# Altium PCB 100064667.PcbDoc (part 2 of 2)
Units mil, origin at the board's own origin, x right, y up, seen from the top; angles counter-clockwise.
Board outline 1193.35 x 1920 mil, 8 copper layers (F.Cu, In1.Cu, In2.Cu, In3.Cu, ln4.Cu, In5.Cu, In6.Cu, B.Cu), stack 57.778 mil thick; 91 components, 64 nets, 294 pads, 112 vias.
Unrouted connection lines stored in the file: 2.
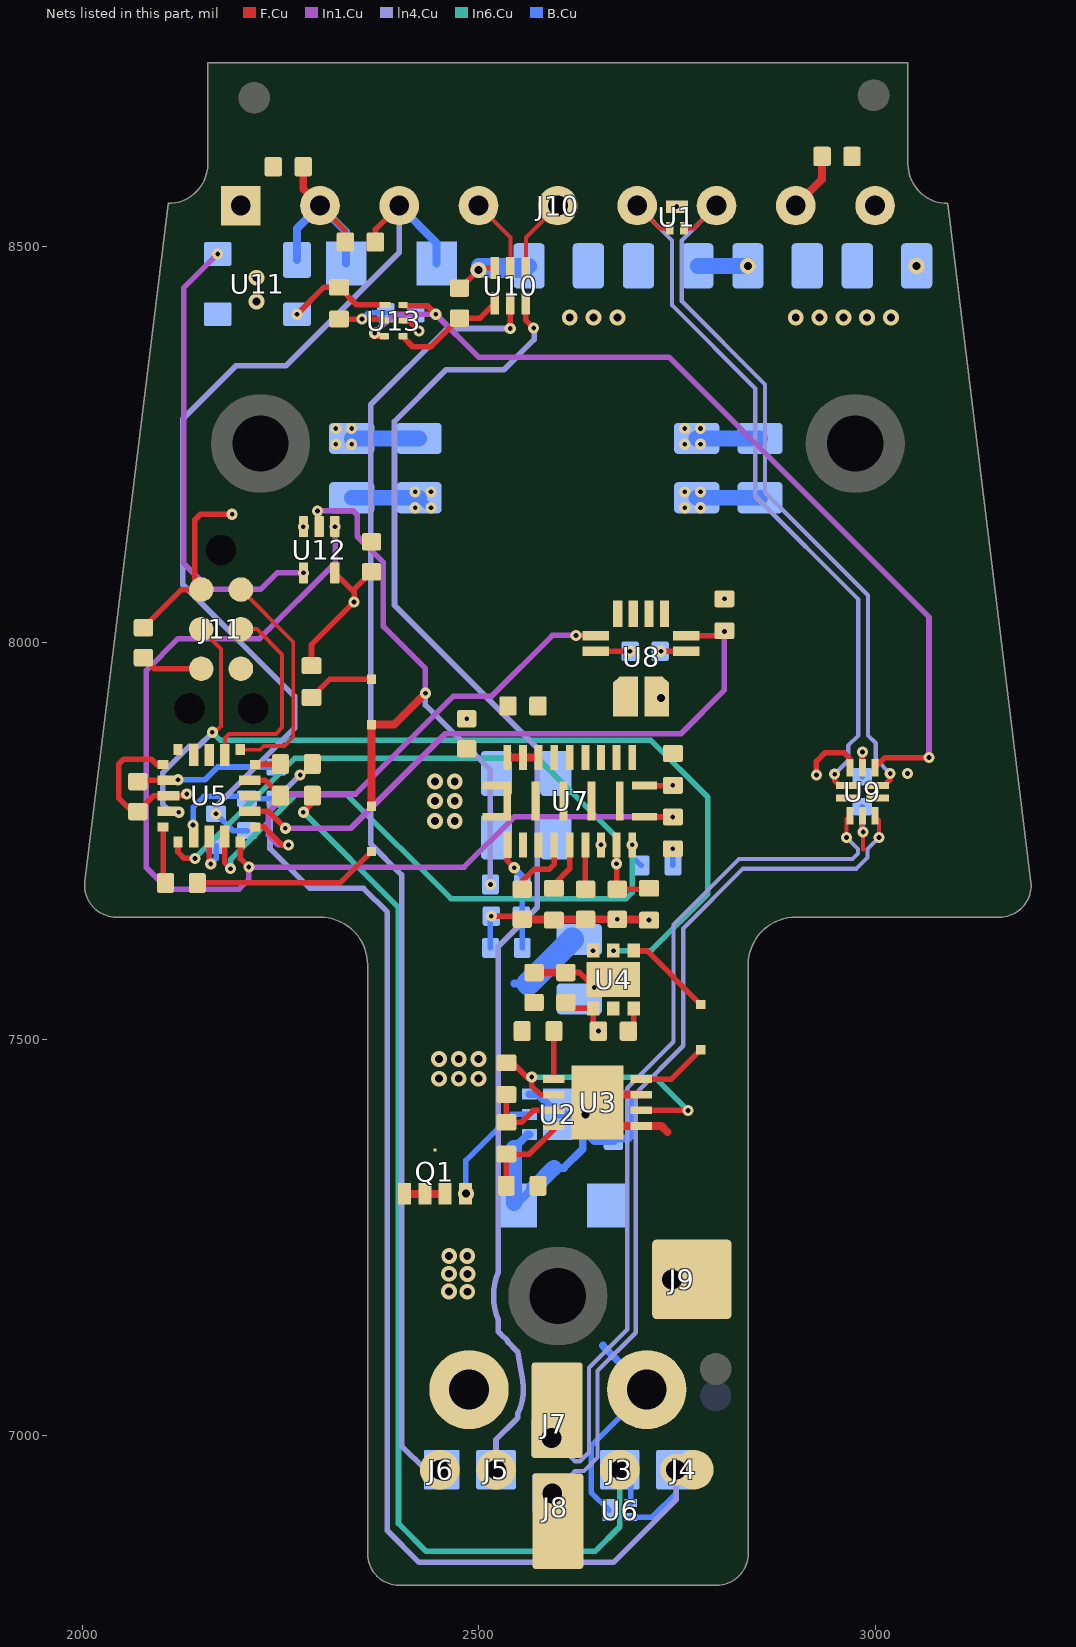
[diagram p8: the nets of this part, all layers, seen from the top]

## Part data
C1 C2 C6 C7 C13 C18 C23 C27 C28 C29 C30 C31 C32 C33: library part CAP-00363-2, "Cap 0402 100nF 10% X7R", Manufacturer="Murata Electronics", MPN=GCM155R71H104ME02D, Footprint=Capacitor_SMD:C_0402_1005Metric, Datasheet=https://search.murata.co.jp/Ceramy/image/img/A01X/G101/ENG/GCM155R71H104ME02-01.pdf, Description="CAP CER 0.1UF 50V X7R 0402", ki_fp_filters=C_*
C3 C11 C12: library part CAP-00370-1, "CAP 0805 10UF 50V 10% X5R", MPN=GRM21BR61H106KE43L, Manufacturer="Murata Electronics", Footprint=Capacitor_SMD:C_0805_2012Metric, Datasheet=https://search.murata.co.jp/Ceramy/image/img/A01X/G101/ENG/GRM21BR61H106KE43-01A.pdf, Description="CAP CER 10UF 50V X5R 0805", ki_fp_filters=C_*
C4 C14: library part CAP-00186-4, "0402 10 nF 50 V ±10 % Tolerance X7R SMT Multilayer Ceramic Capacitor", Manufacturer="Murata Electronics", MPN=GCM155R71H103KA55D, Footprint=Capacitor_SMD:C_0402_1005Metric, Datasheet=https://search.murata.co.jp/Ceramy/image/img/A01X/G101/ENG/GCM155R71H103KA55-01.pdf, Description="CAP CER 10000PF 50V X7R 0402"
C5 C9: library part CAP-00021-6, "Cap 0402 10uF 10V 20% X5R", Manufacturer="Murata Electronics", MPN=GRM155R60J106ME05D, Footprint=Capacitor_SMD:C_0402_1005Metric, Datasheet=https://search.murata.co.jp/Ceramy/image/img/A01X/G101/ENG/GRM155R60J106ME05-01A.pdf, Description="CAP CER 10UF 6.3V X5R 0402", ki_fp_filters=C_*
C8: library part CAP-00371-1, "CAP 0402 4700PF 50V 10% X7R", MPN=GCM155R71H472KA37J, Manufacturer="Murata Electronics", Footprint=Capacitor_SMD:C_0402_1005Metric, Datasheet=https://search.murata.co.jp/Ceramy/image/img/A01X/G101/ENG/GCM155R71H472KA37-01.pdf, Description="CAP CER 4700PF 50V X7R 0402"
C10: library part CAP-00366-2, "Cap 0402 0.33uF 16V 10% X7S", Manufacturer="Murata Electronics", MPN=GRT155R61A334KE01J, Footprint=Capacitor_SMD:C_0402_1005Metric, Datasheet=https://search.murata.co.jp/Ceramy/image/img/A01X/G101/ENG/GRT155R61A334KE01-01.pdf, Description="CAP CER 0.33UF 10V X5R 0402", ki_fp_filters=C_*
C15 C16 C17 C19 C20 C21 C22: library part CAP-00375-1, "CAP 0805 22uF 35V 20% X5R", Manufacturer="TDK Corporation", MPN=C2012X5R1V226M125AC, Footprint=Capacitor_SMD:C_0805_2012Metric, Datasheet=https://product.tdk.com/system/files/dam/doc/product/capacitor/ceramic/mlcc/catalog/mlcc_commercial_general_en.pdf, Description="CAP CER 22UF 35V X5R 0805", ki_fp_filters=C_*
C24: library part CAP-00372-1, "CAP 0805 4.7UF 50V 10% X7R", Manufacturer="Murata Electronics", MPN=GRM21BZ71H475KE15L, Footprint=Capacitor_SMD:C_0805_2012Metric, Datasheet=https://search.murata.co.jp/Ceramy/image/img/A01X/G101/ENG/GRM21BZ71H475KE15-01.pdf, Description="CAP CER 4.7UF 50V X7R 0805", ki_fp_filters=C_*
D1: library part CMP-00657-1, "SMF Series 200 W 26 V Uni-Directional Surface Mount TVS Diode - SOD-123F", Mfr=Littelfuse, MPN=SMF26CA, Footprint=1a_Littelfuse:SOD-123FL, Datasheet=https://www.littelfuse.com/~/media/electronics/datasheets/tvs_diodes/littelfuse_tvs_diode_smf_datasheet.pdf.pdf, Description="TVS SOD123FL 26V 200W BIDIR", Manufacturer=Littelfuse
D4: library part CMP-00658-1, "ESD protection diodes / TVS diodes; LITTELFUSE; SMF3.3; 6.8 V; 30 A; 3.3 V; 3.4 V - 4.3 V", Mfr=Littelfuse, MPN=SMF3.3, Footprint=1a_Littelfuse:SOD-123FL, Datasheet=https://www.littelfuse.com/~/media/electronics/datasheets/tvs_diodes/littelfuse_tvs_diode_smf3_3_datasheet.pdf.pdf, Description="TVS DIODE 3.3VWM 6.8VC SOD123FL", Manufacturer=Littelfuse
FID1 FID2 FID3 FID4 FID5 FID6: library part Fiducial_40mil_mask_60mil, Footprint=1a_TestBoard_Library:Fiducial_Cu0.040_Mask0.060, ki_fp_filters=Fiducial*
J1 J2: library part PTH_18AWG, Footprint=1a_Misc:PTH_18AWG
J3 J4 J5 J6 J7 J8 J9: library part PTH_24AWG_offset_rectangle
  J3: Footprint=1a_Misc:PTH_24AWG_offset_L_flipped_complement
  J4: Footprint=1a_Misc:PTH_24AWG_offset_L_flipped
  J5: Footprint=1a_Misc:PTH_24AWG_offset_L_complement
  J6: Footprint=1a_Misc:PTH_24AWG_offset_L
  J7: Footprint=1a_Misc:PTH_24AWG_offset_120x64_flipped
  J8: Footprint=1a_Misc:PTH_24AWG_offset_120x64
  J9: Footprint=1a_Misc:PTH_24AWG_100_mil_square
J10: library part 399-10-109-10-007000, Manufacturer="Mill-Max Manufacturing Corp.", Footprint=1a_Misc:399-10-109-10-007000, Datasheet=https://www.mouser.com/datasheet/2/273/MMMC_S_A0002059875_1-2553789.pdf, Description="Pogo pin target, 9 socket, 0.1\" pitch, right angle", MPN=399-10-109-10-007000
J11: library part Conn_ARM_SWD_TagConnect_TC2030-NL, Manufacturer="Tag-Connect LLC", MPN=TC2030-CTX, Footprint=Connector:Tag-Connect_TC2030-IDC-NL_2x03_P1.27mm_Vertical, Datasheet=https://www.tag-connect.com/wp-content/uploads/bsk-pdf-manager/TC2030-CTX_1.pdf, Description="Tag-Connect ARM Cortex SWD JTAG connector, 6 pin, no legs", ki_fp_filters=*TC2030*
JP1 JP2: library part Jumper_2_Bridged, Footprint=Jumper:SolderJumper-2_P1.3mm_Open_TrianglePad1.0x1.5mm, ki_fp_filters="Jumper* TestPoint*2Pads* TestPoint*Bridge*"
JP3: library part Jumper_2_Open, Footprint=Jumper:SolderJumper-2_P1.3mm_Open_TrianglePad1.0x1.5mm, ki_fp_filters="Jumper* TestPoint*2Pads* TestPoint*Bridge*"
MH1 MH2 MH3: library part 96773A622_0.125in_keepout, Footprint=1a_Misc:96773A622_M1.6_screw_hole_0.125in_keepout, Datasheet=https://www.mcmaster.com/mvD/Library/M1/20210910/B2E27164/96773A622_JIS%20Steel%20Pan%20Head%20Screws.PDF, Description="Mounting hole for 96773A622 M1.6 screw 0.125\" keepout"
Q1: library part CMP-00665-1, "Transistor MOSFET N-Channel 40V 150A 8-Pin PQFN T/R", Manufacturer=onsemi, MPN=NTTFS2D1N04HLTWG, Footprint=1a_Misc:WDFN8_3.3_x_3.3_0.65mm_p, Datasheet=https://www.onsemi.com/pdf/datasheet/nttfs2d1n04hl-d.pdf, Description="MOSFET N-CH 40V 24A/150A 8PQFN"
R1: library part RES-00797-1, "RES 0402 787K 1% 1/10W", MPN=ERJ-2RKF7873X, Manufacturer="Panasonic Electronic Components", Footprint=Resistor_SMD:R_0402_1005Metric, Datasheet=https://industrial.panasonic.com/cdbs/www-data/pdf/RDA0000/AOA0000C304.pdf, Description="RES SMD 787K OHM 1% 1/10W 0402", ki_fp_filters=R_*
R2: library part RES-00798-1, "RES 0402 12.4K 1% 1/16W", MPN=ERA-2ARB1242X, Manufacturer="Panasonic Electronic Components", Footprint=Resistor_SMD:R_0402_1005Metric, Datasheet=https://industrial.panasonic.com/cdbs/www-data/pdf/RDM0000/AOA0000C307.pdf, Description="RES SMD 12.4KOHM 0.1% 1/16W 0402", ki_fp_filters=R_*
R3: library part RES-00272-5, "Res Thick Film 0402 200K Ohm 1% 1/16W ±100ppm/°C Molded SMD SMD Paper Tape on Plastic Reel", Manufacturer="Stackpole Electronics Inc", MPN=RNCF0402BKE200K, Footprint=Resistor_SMD:R_0402_1005Metric, Datasheet=https://www.seielect.com/Catalog/SEI-RNCF.pdf, Description="RES 200K OHM 0.1% 1/16W 0402"
R4: library part RES-00800-1, "RES 0402 1K 1/10W 1%", Mfr=Panasonic, Manufacturer="Panasonic Electronic Components", MPN=ERJ-2RKF1001X, Footprint=Resistor_SMD:R_0402_1005Metric, Datasheet=https://industrial.panasonic.com/cdbs/www-data/pdf/RDA0000/AOA0000C304.pdf, Description="RES SMD 1K OHM 1% 1/10W 0402", ki_fp_filters=R_*
R5 R6: library part RES-00801-1, "RES 0402 200 OHM 1/10W 1%", MPN=ERJ-2RKF2000X, Mfr=Panasonic, Manufacturer="Panasonic Electronic Components", Footprint=Resistor_SMD:R_0402_1005Metric, Datasheet=https://industrial.panasonic.com/cdbs/www-data/pdf/RDA0000/AOA0000C304.pdf, Description="RES SMD 200 OHM 1% 1/10W 0402", ki_fp_filters=R_*
R7 R8: library part RES-00296-6, "Res 0402 2K Ohm 1/10W 1% Thick Flim", MPN=ERJ-2RKF2001X, Manufacturer="Panasonic Electronic Components", Footprint=Resistor_SMD:R_0402_1005Metric, Datasheet=https://industrial.panasonic.com/cdbs/www-data/pdf/RDA0000/AOA0000C304.pdf, Description="RES SMD 2K OHM 1% 1/10W 0402", ki_fp_filters=R_*
R9: library part RES-00021-9, "Res 0402 100 Ohm 0.1W 1% Thick Film", MPN=ERJ-2RKF1000X, Mfr=Panasonic, Manufacturer="Panasonic Electronic Components", Footprint=Resistor_SMD:R_0402_1005Metric, Datasheet=https://industrial.panasonic.com/cdbs/www-data/pdf/RDA0000/AOA0000C304.pdf, Description="RES SMD 100 OHM 1% 1/10W 0402", ki_fp_filters=R_*
R10 R11: library part RES-00802-1, "RES 0402 499 OHM 1/10W 1%", Manufacturer="Panasonic Electronic Components", MPN=ERJ-2RKF4990X, Footprint=Resistor_SMD:R_0402_1005Metric, Datasheet=https://industrial.panasonic.com/cdbs/www-data/pdf/RDA0000/AOA0000C304.pdf, Description="RES SMD 499 OHM 1% 1/10W 0402", ki_fp_filters=R_*
R12: library part RES-00405-6, "Res 0402 20k 1/16W 1% Thick Film", MPN=ERJ-2RKF2002X, Manufacturer="Panasonic Electronic Components", Footprint=Resistor_SMD:R_0402_1005Metric, Datasheet=https://industrial.panasonic.com/cdbs/www-data/pdf/RDA0000/AOA0000C304.pdf, Description="RES SMD 20K OHM 1% 1/10W 0402", ki_fp_filters=R_*
R13: library part RES-00025-9, "Res 0402 1.00M 0.1W 1% Thick Film", MPN=ERJ-2RKF1004X, Manufacturer="Panasonic Electronic Components", Footprint=Resistor_SMD:R_0402_1005Metric, Datasheet=https://industrial.panasonic.com/cdbs/www-data/pdf/RDA0000/AOA0000C304.pdf, Description="RES SMD 1M OHM 1% 1/10W 0402", ki_fp_filters=R_*
R14 R15 R20: library part RES-00803-1, "RES 0402 10K 1/10W 1%", MPN=ERJ-U02F1002X, Manufacturer="Panasonic Electronic Components", Footprint=Resistor_SMD:R_0402_1005Metric, Datasheet=https://industrial.panasonic.com/cdbs/www-data/pdf/RDP0000/AOA0000C334.pdf, Description="RES 10K OHM 1% 1/10W 0402", ki_fp_filters=R_*
R16: library part RES-00804-1, "RES 0402 22.1K 1/10W 1%", MPN=ERJ-2RKF2212X, Manufacturer="Panasonic Electronic Components", Footprint=Resistor_SMD:R_0402_1005Metric, Datasheet=https://industrial.panasonic.com/cdbs/www-data/pdf/RDA0000/AOA0000C304.pdf, Description="RES SMD 22.1K OHM 1% 1/10W 0402", ki_fp_filters=R_*
R17: library part RES-00805-1, "RES 0402 1.07K 1/10W 1%", MPN=ERJ-2RKF1071X, Manufacturer="Panasonic Electronic Components", Footprint=Resistor_SMD:R_0402_1005Metric, Datasheet=https://industrial.panasonic.com/cdbs/www-data/pdf/RDA0000/AOA0000C304.pdf, Description="RES SMD 1.07K OHM 1% 1/10W 0402", ki_fp_filters=R_*
R18 R19: library part RES-00031-9, "Res 0402 100K 1/10W 1% Thick Flim", MPN=ERJ-2RKF1003X, Manufacturer="Panasonic Electronic Components", Footprint=Resistor_SMD:R_0402_1005Metric, Datasheet=https://industrial.panasonic.com/cdbs/www-data/pdf/RDA0000/AOA0000C304.pdf, Description="RES SMD 100K OHM 1% 1/10W 0402", ki_fp_filters=R_*
R21: library part RES-00031-9, "Res 0402 100K 1/10W 1% Thick Flim", Manufacturer="Panasonic Electronic Components", MPN=ERJ-2RKF1003X, Footprint=Resistor_SMD:R_0402_1005Metric, Datasheet=https://industrial.panasonic.com/cdbs/www-data/pdf/RDA0000/AOA0000C304.pdf, Description="RES SMD 100K OHM 1% 1/10W 0402", ki_fp_filters=R_*
U1 U6: library part CMP-00652-1, "Extremely low capacitance unidirectional ESD protection diode array", MPN=PESD5V0C2UM, Mfr=Nexperia, Footprint=Package_DFN_QFN:Diodes_DFN1006-3, Datasheet=https://assets.nexperia.com/documents/data-sheet/PESD5V0C2UM.pdf, Description="TVS DIODE 5VWM 3.4VC DFN1006-3", Manufacturer=Nexperia
U2: library part IC-00420-1, "OR Controller N-Channel Single 2.4Ohm Automotive 6-Pin WDFNW EP T/R", Manufacturer=onsemi, MPN=NCV68261MTWAITBG, Footprint=1a_Misc:WDFNW6_2x2_0.65p_EP, Datasheet=https://www.onsemi.com/pdf/datasheet/ncv68261-d.pdf, Description="Power Switch/Driver 1:1 N-Channel 6-WDFNW (2x2)"
U3: library part IC-00424-1, "IC SUPERVISOR 1 CHANNEL 8DFN Supervisor Open Drain or Open Collector 1 Channel 8-DFN (3x3)", Manufacturer="Analog Devices Inc.", MPN=LTC2965HDD#PBF, Footprint=Package_DFN_QFN:DFN-8-1EP_3x3mm_P0.5mm_EP1.66x2.38mm, Datasheet=https://www.analog.com/media/en/technical-documentation/data-sheets/2965fc.pdf, Description="IC SUPERVISOR 1 CHANNEL 8DFN"
U4: library part IC-00416-1, "LDO Regulator, 150 mA, 38 V, 1 uA IQ, with PG 3V3 HZ, WDFN6 2x2", Manufacturer=onsemi, MPN=NCP730BMT330TBG, Footprint=1a_Misc:WDFN6_2x2_0.65p_1.72x1.12mm_EP, Datasheet=https://www.onsemi.com/pdf/datasheet/ncp730-d.pdf, Description="IC REG LINEAR 3.3V 150MA 6WDFN"
U5: library part IC-00427-1, "RISC Microcontroller, 32-Bit, FLASH, CORTEX-M4F CPU, 180MHz, CMOS, PBGA216", MPN=STM32C011F6U6TR, Manufacturer=STMicroelectronics, Footprint=Package_DFN_QFN:ST_UFQFPN-20_3x3mm_P0.5mm, Datasheet=https://www.st.com/resource/en/datasheet/stm32c011f4.pdf, Description="STMicroelectronics Arm Cortex-M0+ MCU, 32KB flash, 6KB RAM, 48 MHz, 2.0-3.6V, 18 GPIO, UFQFPN20", ki_fp_filters=ST*UFQFPN*3x3mm*P0.5mm*
U7: library part CMP-00666-1, "7mΩ Protection Switch with Current Monitor for Automotive Battery Systems AEC-Q100 Qualified", Manufacturer="Monolithic Power Systems Inc.", MPN=MPQ5069GQV-AEC1-Z, Footprint=1a_Misc:QFN-22_3_x_5mm, Datasheet=https://www.monolithicpower.com/en/documentview/productdocument/index/version/2/document_type/Datasheet/lang/en/sku/MPQ5069GQV-AEC1/document_id/8141/, Description="Power Switch/Driver 1:1 15A 22-QFN (3x5)"
U8: library part CMP-00662-1, "Linear Current Sensor with Overcurrent Fault Output with <100 V Isolation, QFN-12, RoHS", MPN=ACS711KEXLT-15AB-T, Manufacturer="Allegro MicroSystems", Footprint=Sensor_Current:Allegro_QFN-12-10-1EP_3x3mm_P0.5mm, Datasheet=http://www.allegromicro.com/~/Media/Files/Datasheets/ACS711-Datasheet.ashx, Description="±15A Bidirectional Hall-Effect Current Sensor, +3.3V supply, 90mV/A, QFN-12", ki_fp_filters=Allegro*QFN*EP*3x3mm*P0.5mm*
U9: library part IC-00423-1, "USB Interface, 1: 2 Multiplexer/Demultiplexer Switch, USB 2.0, 2.3 V, 4.3 V, UQFN-B, 10 Pins", MPN=TC7USB40MU, Manufacturer="Toshiba Semiconductor and Storage", Footprint="1a_Misc:Toshiba UQFN-10_1.4x1.8mm_P0.4mm", Datasheet=https://toshiba.semicon-storage.com/info/docget.jsp?did=13632&prodName=TC7USB40MU, Description="IC USB SWITCH SPDT DUAL 10UQFN"
U10: library part IC-00417-1, "Industry's Smallest DPST Can Switch ±5.5V Signals with a Single VCC as Low as 1.6V", MPN=MAX20336AEFT+, Manufacturer="Analog Devices Inc./Maxim Integrated", Footprint=1a_Misc:FC2QFN-6, Datasheet=https://www.analog.com/media/en/technical-documentation/data-sheets/MAX20336.pdf, Description="IC SWITCH DPSTX1 330MOHM 6WLP"
U11: library part IC-00421-1, "4-Pin, µP Voltage Monitors with Pin-Selectable Power-On Reset Timeout Delay", MPN=MAX821UUS+T, Manufacturer="Analog Devices Inc./Maxim Integrated", Footprint="1a_Misc:SOT-143 Maxim", Datasheet=https://www.analog.com/media/en/technical-documentation/data-sheets/max821-max822t.pdf, Description="IC SUPERVISOR 1 CHANNEL 2.78V S78OT143-4"
U12: library part IC-00426-1, "1-ch, 2-input 1.65-V to 5.5-V 32 mA drive strength AND gate 5-SOT-5X3 -40 to 125", MPN=SN74LVC1G08DRLR, Manufacturer="Texas Instruments", Footprint="1a_Misc:SOT-553 Texas Instruments DRL", Datasheet=https://www.ti.com/lit/ds/symlink/sn74lvc1g08.pdf, Description="Single AND Gate, Low-Voltage CMOS", ki_fp_filters="SOT?23* Texas?R-PDSO-G5?DCK* Texas?R-PDSO-N5?DRL* Texas?X2SON*0.8x0.8mm*P0.48mm*"
U13: library part IC-00422-1, "IC INVERTER 2CH 2-INP 6SON Inverter IC 2 Channel 6-SON (1.45x1)", MPN=SN74AUP3G04DQER, Manufacturer="Texas Instruments", Footprint="1a_Misc:QFN-6_1.4x1mm_P0.5mm TI DRY6", Datasheet=https://www.ti.com/lit/ds/symlink/sn74aup3g04.pdf, Description="IC INVERTER 3CH 3-INP 8X2SON", ki_fp_filters=DQE8

## Via types
v1: diameter 14, hole 6, F.Cu to B.Cu, tented both sides, 78 vias
v2: diameter 20, hole 10, F.Cu to B.Cu, tented both sides, 34 vias

## Nets (pads, with @x,y where several pads share a name; then routed paths per layer and width w, separated by ;. In a path a pad name is that pad's centre, name@x,y a point inside that pad or via, vN(x,y) a via of type N, cw(c..) or ccw(c..) an arc to the next point about the centre after c; other vN are vias at no path point)
1WIRE_RX: R9.2 U5.8 | length 61.5
  F.Cu w7: U5.8@2160.32,7755.64 2160.32,7722.82 v1(2162.32,7720.82)
  B.Cu w7: v1(2162.32,7720.82) 2169,7727.5 R9.2@2169,7743.92
1WIRE_TX: R10.2 R11.1 U5.7 | length 148.8
  F.Cu w7: v1(2140,7770) 2140.63,7769.37 U5.7@2140.63,7755.64
  B.Cu w7: v1(2140,7770) 2140,7792.25 2153.75,7806 2205.08,7806 R11.1@2208,7803.08 2244.84,7803.08 R10.2@2245,7802.92
AUX1: J3.1 R6.1 U6.1 | length 1398.4
  F.Cu w5: R6.1@2290.39,7797.39 R6.1@2290.39,7806.82
  F.Cu w7: v1(2279,7786) R6.1@2290.39,7797.39
  In6.Cu w7: v1(2279,7786) 2399,7666 2399,6889 2434,6854 2647,6854 2678,6885 J3.1@2678,6957
  B.Cu w7: J3.1@2678,6957 2691.78,6943.22 U6.1@2691.78,6914.86
AUX2: J4.1 R5.1 U6.2 | length 1641.8
  F.Cu w5: v1(2275,7833) v1@2276.57,7833
  F.Cu w7: v1@2276.57,7833 R5.1@2290.39,7846.82
  ln4.Cu w7: v1(2275,7833) 2237,7795 2237,7740.25 2287.25,7690 2355,7690 2385,7660 2385,6880 2425,6840 2670,6840 2749,6919 J4.1@2749,6957
  B.Cu w7: U6.2@2691.78,6897.14 2691.92,6897 2719,6897 2749,6927 J4.1@2749,6957
DATA_ENABLE: U11.4 U12.4 | length 581.4
  In1.Cu w7: v1(2171,8490) 2128,8447 2128,8100 2161,8067 2225,8067 2245.87,8087.87 v1(2279.32,8087.87)
DETECT: C8.1 D4.1 J10.3 R9.1 R11.2 | length 1215.1
  F.Cu w7: C8.1@2369.9,8505 2369.9,8520.9 J10.3@2400,8551
  ln4.Cu w7: v1(2169,7784.08) 2169,7793 2268,7892 2268,7932 2127,8073 2127,8282 2194,8349 2257,8349 2400,8492 J10.3@2400,8551
  B.Cu w7: v1(2169,7784.08) 2190.16,7762.92 R11.2@2208,7762.92
  B.Cu w10: J10.3@2400,8551 2447.09,8503.91 D4.1@2447.09,8478
GND: C1.2 C2.2 C3.2 C4.2 C5.2 C6.2 C7.1 C8.2 C9.2 C10.2 C11.2 C12.2 C13.2 C14.2 C15.2 C16.2 C17.2 C18.1 C19.2 C20.2 C21.2 C22.2 C23.2 C24.2 C27.1 C28.2 C29.2 C30.2 C31.2 C32.2 C33.2 D1.2 D4.2 J2.1 J9.1 J10.2 J10.8 J11.5 R3.2 R13.2 R14.2 R15.2 R17.2 R21.2 U1.3 U2.3 U2.5 U2.7 U3.5 U3.7 U3.9 U4.3 U4.7 U5.1 U5.3 U6.3 U7.7 U8.3 U9.4 U9.10 U10.3 U11.1 U12.3 U13.2 | length 2240.8
  F.Cu w5: U9.4@2984,7781.74 2984,7762 v1(2985,7761) 2985,7739
  F.Cu w7: C7.1@2077.32,7980.92 2091.42,7966.82 J11.5@2150.32,7966.82 ; U5.1@2102.24,7846.19 2093.94,7846.19 2087.32,7852.82 2052.32,7852.82 2046,7846.5 2046,7804.13 2063.21,7786.92 C6.2@2070.32,7786.92 2090.21,7806.82 U5.3@2109.13,7806.82 2129.82,7806.82 v1(2132,7809) ; v1(2279,8146) 2279.13,8146.13 U12.3@2279.32,8146.13 ; J10.2@2300,8551 2332.1,8518.9 C8.2@2332.1,8505 ; R21.2@2324,8407.92 2379.17,8407.92 U13.2@2381.09,8406 ; C29.2@2476,8446.9 2476.9,8446.9 v2(2500,8470) 2502.4,8472.4 U10.3@2520.32,8472.4 ; v1(2516.1,7655) 2551.1,7655 C10.2@2555,7651.1 ; C5.2@2610,7583.9 2627.1,7583.9 v1(2646,7565) ; C4.2@2688.9,7510 2695.59,7516.69 U4.3@2695.59,7538.58 ; v1(2730,7989.06) U8.3@2762.09,7989.06 ; v1(2926,7833) 2926,7850 2937,7861 2961,7861 2968.25,7853.75 U9.10@2968.25,7842.26
  F.Cu w10: C32.2@2278.9,8600 2278.9,8572.1 J10.2@2300,8551 ; C10.2@2555,7651.1 2555.59,7650.51 2594.41,7650.51 R14.2@2595,7649.92 2595.59,7650.51 2634.41,7650.51 C14.2@2635,7651.1 v1(2675,7651.1) 2675.59,7650.51 2714.49,7650.51 v1(2715,7650) ; C2.2@2570,7583.9 C5.2@2610,7583.9 ; U3.7@2705.12,7429.84 2659.84,7429.84 U3.9@2650,7420 2679.53,7390.47 U3.5@2705.12,7390.47 2730.53,7390.47 2738,7383 ; J10.8@2900,8551 2933.1,8584.1 C33.2@2933.1,8613
  B.Cu w7: v1(2353,8408) 2361,8416 C31.2@2383.1,8416 ; R13.2@2514.92,7615 2514.92,7653.82 v1(2516.1,7655) ; U2.5@2635.83,7405 2666.1,7405 C1.2@2670,7408.9 ; U6.3@2664.22,6906 2642,6928.22 2642,6987 2712,7057 J2.1@2712,7058 ; C28.2@2984,7793.1 2984,7762 v1(2985,7761)
  B.Cu w10: U11.1@2271,8482.5 2271,8522 J10.2@2300,8551 2332.91,8518.09 D4.2@2332.91,8478 ; U2.3@2563.87,7430.4 2574.6,7430.4 U2.7@2600,7405 v2(2635.09,7404.98) ; 2656.68,7113.32 J2.1@2712,7058
  B.Cu w20: C15.2@2340,8257.4 C19.2@2425,8257.4 ; v2(2500,8470) 2558.6,8470 C22.2@2563.6,8475 v2@2500.4,8475 ; C21.2@2775,8257.4 C20.2@2855,8257.4 ; C17.2@2776.4,8475 v2(2839.6,8475)
  other v1: 2654.37,7744.88 3041,7835 2485,7903.9 2320,8250 2340,8250 2760,8250 2780,8250 2320,8270 2340,8270 2760,8270 2780,8270 2750,8549.78
  other v2: 3052.4,8475
GPIO0: J6.1 U10.5 | length 1618.9
  F.Cu w7: v1(2540,8396) U10.5@2540,8427.6
  ln4.Cu w7: J6.1@2433,6957 2403,6987 2403,7707 2364,7746 2364,8300 2460,8396 v1(2540,8396)
GPIO1: J5.1 U10.6 | length 1710.1
  F.Cu w7: U10.6@2559.68,8427.6 2559.68,8406.32 v1(2569.5,8396.5)
  ln4.Cu w7: J5.1@2522,6957 2522,6995 2547.48,7020.48 2549.53,7022.53 2549.53,7027.89 ccw(c2488,7058) 2555.55,7069.4 2549.53,7105.45 2547.48,7107.52 2537,7118 2537,7119 2527.05,7128.95 2525,7131 2525,7145.41 cw(c2600,7176) 2519,7176 cw(c2600,7176) 2525,7206.59 2525,7617 2574,7666 2574,7867 2394,8047 2394,8279 2459,8344 2532,8344 2570,8382 2570,8396 v1(2569.5,8396.5)
GPIO_DOWN_0: J10.4 U10.2 | length 95.2
  F.Cu w5: J10.4@2500,8551 2540,8511 U10.2@2540,8472.4
GPIO_DOWN_1: J10.5 U10.1 | length 95.3
  F.Cu w5: U10.1@2559.68,8472.4 2559.68,8510.68 J10.5@2600,8551
I_FAULT: R20.2 U5.12 U8.4 | length 804
  F.Cu w7: U5.12@2211.5,7787.13 2235,7787.13 v1(2256.32,7765.82) ; U8.4@2762.09,8008.74 2803.82,8008.74 R20.2@2810,8014.92
  In1.Cu w7: v1(2256.32,7765.82) 2338.82,7765.82 2458,7885 2755,7885 2810,7940 v1(2810,8014)
I_SNS: U5.11 U8.9 | length 616.1
  F.Cu w7: U5.11@2218.39,7767.45 2229.68,7767.45 2252.32,7744.82 v1(2260.32,7744.82) ; v1(2623,8009) 2647.65,8009 U8.9@2647.91,8008.74
  In1.Cu w7: v1(2260.32,7744.82) 2247.18,7744.82 2235,7757 2235,7786 2258,7809 2345,7809 2468,7932 2516,7932 2593,8009 v1(2623,8009)
IMON: C18.2 R15.1 U5.6 U7.8 | length 793.8
  F.Cu w7: U5.6@2120.94,7748.75 2120.94,7735.69 2128.82,7727.82 v1(2142.32,7727.82) ; U7.8@2674.06,7744.88 2674,7744.83 v1(2674,7721) 2674,7689.9 C18.2@2675,7688.9 2713.82,7688.9 R15.1@2715,7690.08
  In6.Cu w7: v1(2142.32,7727.82) 2142.32,7728.31 2268,7854 2575,7854 2674,7755 v1(2674,7721)
LDO_EN: JP1.2 U4.4 | length 112.5
  F.Cu w7: U4.4@2695.59,7611.42 2712.13,7611.42 JP1.2@2780,7543.54
LS_FAULT: R19.2 U5.9 U7.9 | length 743.7
  F.Cu w7: U5.9@2180,7755.64 2180,7722.13 v1(2187.32,7714.82)
  In6.Cu w7: v1(2187.32,7714.82) 2187.32,7726.31 2269,7808 2334,7808 2465,7677 2686,7677 2693.74,7684.74 v1(2693.74,7744.88)
  B.Cu w7: v1(2693.74,7744.88) 2693.74,7730.18 R19.2@2704.92,7719
LS_PWR_GOOD: R18.2 U5.10 U7.10 U12.1 | length 1383.2
  F.Cu w7: U5.10@2199.69,7748.75 2199.68,7727.45 v1(2210.32,7716.82) ; U12.1@2318.68,8146.13 2318.87,8146.13 v1(2319,8146) ; U7.10@2709.49,7780.31 2709.72,7780.08 v1(2745,7780.08)
  In1.Cu w7: v1(2319,8146) 2319,8100 2224,8005 2121,8005 2081,7965 2081,7716 2108,7689 2198,7689 2210.32,7701.31 v1(2210.32,7716.82) 2481.82,7716.82 2545.08,7780.08 v1(2745,7780.08)
Net-(JP1-A): JP1.1 U3.8 | length 90.2
  F.Cu w7: U3.8@2705.12,7449.53 2743.07,7449.53 JP1.1@2780,7486.46
Net-(JP2-A): JP2.1 R8.2 | length 236
  F.Cu w7: R8.2@2145.39,7696.82 2325.36,7696.82 JP2.1@2365,7736.46
Net-(JP2-B): JP2.2 JP3.1 R12.1 U12.2 | length 795.6
  F.Cu w7: v1(2297,8166) 2299,8164 U12.2@2299,8146.13
  F.Cu w10: JP2.2@2365,7793.54 JP3.1@2365,7896.46 2393.46,7896.46 v1(2433,7936)
  In1.Cu w7: v1(2297,8166) 2342,8166 2347,8161 2347,8134 2380,8101 2380,8020 2433,7967 v1(2433,7936)
  ln4.Cu w7: v1(2433,7936) 2433,7921 2514.92,7839.08 v1(2514.92,7695)
Net-(JP3-B): JP3.2 R7.2 | length 85.1
  F.Cu w7: R7.2@2289.32,7930.74 2312.12,7953.54 JP3.2@2365,7953.54
Net-(Q1-G): Q1.4 U2.2 | length 146.2
  B.Cu w7: v2(2484,7305) 2484,7347 2542,7405 U2.2@2564.17,7405
Net-(U3-INH): R1.2 R2.1 U3.3 | length 101
  F.Cu w7: R1.2@2535,7429.92 R2.1@2535,7395.08 2554.08,7395.08 2569.16,7410.16 U3.3@2594.88,7410.16
Net-(U3-INL): R2.2 R3.1 U3.4 | length 117.3
  F.Cu w7: R3.1@2534.92,7315 2535,7315.08 R2.2@2535,7354.92 2563.92,7354.92 2594.88,7385.88 U3.4@2594.88,7390.47
Net-(U3-VIN): R4.2 U3.1 | length 60.6
  F.Cu w7: U3.1@2594.88,7449.53 2594.88,7509.8 R4.2@2595.08,7510
Net-(U5-PA0): R8.1 U5.5 | length 71.9
  F.Cu w7: U5.5@2102.24,7767.45 2102.24,7699.81 R8.1@2105.24,7696.82
Net-(U5-PA9{slash}PA11): R6.2 U5.14 | length 46.9
  F.Cu w7: U5.14@2211.5,7826.5 2230.55,7826.5 R6.2@2250.24,7806.82
Net-(U5-PA10{slash}PA12): R5.2 U5.15 | length 32.1
  F.Cu w7: U5.15@2218.39,7846.19 2249.61,7846.19 R5.2@2250.24,7846.82
Net-(U7-EN): C9.1 R12.2 R13.1 U7.1 | length 138.7
  F.Cu w7: U7.1@2536.26,7744.88 2536.26,7724.74 v1(2545,7716)
  B.Cu w7: v1(2545,7716) 2555.08,7705.92 R12.2@2555.08,7695 2555.08,7656.18 C9.1@2553.9,7655 2555.08,7653.82 R13.1@2555.08,7615
Net-(U7-FB): R16.2 R17.1 U7.11 | length 35.6
  F.Cu w7: U7.11@2709.49,7819.69 2744.76,7819.69 v1(2745,7819.92)
Net-(U7-ISET): R14.1 U7.5 | length 63.1
  F.Cu w7: R14.1@2595,7690.08 2595,7695 2615,7715 U7.5@2615,7744.88
Net-(U7-PD): C23.1 R16.1 U7.12 U7.13 U7.14 U7.15 U7.16 U7.17 U7.18 U7.19 U7.20 U8.1 | length 39.4
  F.Cu w10: U7.20@2536.26,7855.12 U7.19@2555.94,7855.12 U7.18@2575.63,7855.12
Net-(U7-SS): C14.1 U7.6 | length 56.1
  F.Cu w7: U7.6@2634.68,7744.88 2634.68,7689.21 C14.1@2635,7688.9
Net-(U7-TIMER): C10.1 U7.4 | length 83.8
  F.Cu w7: C10.1@2555,7688.9 2555,7699 2570,7714 2589,7714 2595.32,7720.31 U7.4@2595.32,7744.88
Net-(U10-VCCEN): C29.1 U10.4 U13.4 | length 143.4
  F.Cu w7: U13.4@2404.72,8385.28 2417,8373 2440,8373 2440,8373.1 C29.1@2476,8409.1 2501.82,8409.1 U10.4@2520.32,8427.6
Net-(U11-{\R\E\S\E\T\}\)\: R21.1 U11.2 U13.1 | length 133
  F.Cu w7: v1(2271,8414) 2305.08,8448.08 R21.1@2324,8448.08 2346.08,8426 U13.1@2380.76,8426
P3V3: C4.1 C5.1 C6.1 C7.2 C27.2 C28.1 C30.1 C31.1 J11.1 R7.1 R10.1 R18.1 R19.1 R20.1 U4.1 U5.2 U8.10 U9.9 U12.5 U13.5 | length 846.8
  F.Cu w7: C6.1@2070.32,7824.72 2072.1,7826.5 U5.2@2109.13,7826.5 2120.5,7826.5 v1(2121,7827) ; C7.2@2077.32,8018.72 2125.42,8066.82 J11.1@2150.32,8066.82 2142.32,8074.82 2142.32,8154.82 2149.32,8161.82 v1(2189.32,8161.82) ; R7.1@2289.32,7970.9 2289.32,7997.31 v1(2343,8051) ; U12.5@2318.68,8087.87 2343,8063.55 v1(2343,8051) ; C30.1@2365,8089.1 2343,8067.1 v1(2343,8051) ; U13.5@2404.72,8405 2413,8405 v1(2425,8393) ; C5.1@2610,7546.1 2617.52,7538.58 U4.1@2644.41,7538.58 2644.41,7516.69 v1(2651.1,7510) ; U8.10@2647.91,7989.06 2647.97,7989 v1(2691.1,7989) ; U9.9@2984,7842.26 v1(2984,7862)
  B.Cu w7: v1(2121,7827) 2155,7827 2171.08,7843.08 R10.1@2245,7843.08 ; C31.1@2420.9,8416 2420.9,8397.1 v1(2425,8393) ; v1(2745,7740) 2745,7719.08 R19.1@2745.08,7719 ; C28.1@2984,7830.9 v1(2984,7862)
  other v1: 2810,8055.08
RANGE_SEL: R1.1 U3.2 U3.6 | length 357.2
  F.Cu w7: R1.1@2535,7470.08 2542.92,7470.08 2562,7451 2566,7451 v1(2567,7452) 2567,7441 2578.16,7429.84 U3.2@2594.88,7429.84 ; U3.6@2705.12,7410.16 2763.84,7410.16 v1(2764,7410)
  In6.Cu w7: v1(2567,7452) 2722,7452 v1(2764,7410)
RESET: U9.8 U13.3 U13.6 | length 1177
  F.Cu w7: v1(2369,8390) 2372.68,8386.32 U13.3@2381.09,8386.32 ; U13.6@2404.72,8424.68 2435.32,8424.68 v1(2446,8414) ; U9.8@2999.75,7842.26 3012.49,7855 v1(3068,7855)
  In1.Cu w7: v1(2369,8390) 2393,8414 v1(2446,8414) 2500,8360 2740,8360 3068,8032 v1(3068,7855)
SWCLK: J11.4 U5.17 | length 256.6
  F.Cu w5: U5.17@2180,7858 2180,7879.5 2185.32,7884.82 2244.32,7884.82 2252.32,7892.82 2252.32,7984.82 2220.32,8016.82 J11.4@2200.32,8016.82
SWDIO: J11.2 U5.16 | length 286.6
  F.Cu w5: U5.16@2199.69,7864.89 2199.76,7864.82 2224.32,7864.82 2229.32,7869.82 2255.32,7869.82 2266.32,7880.82 2266.32,8000.82 J11.2@2200.32,8066.82
unconnected-(J11-SWO-Pad6): J11.6
unconnected-(U4-NC-Pad2): U4.2
unconnected-(U5-PA8-Pad13): U5.13
unconnected-(U5-PB6-Pad18): U5.18
unconnected-(U5-PB7-Pad19): U5.19
unconnected-(U5-PC14{slash}OSCX_IN-Pad20): U5.20
unconnected-(U7-AUTO-Pad2): U7.2
unconnected-(U7-N{slash}C-Pad3): U7.3
unconnected-(U8-NC-Pad5): U8.5
unconnected-(U8-NC-Pad6): U8.6
unconnected-(U8-NC-Pad7): U8.7
unconnected-(U8-NC-Pad8): U8.8
unconnected-(U9-2D+-Pad2): U9.2
unconnected-(U9-2D--Pad6): U9.6
unconnected-(U11-SRT-Pad3): U11.3
USB_D+: J8.1 U9.5 | length 1118
  F.Cu w5: U9.5@2999.75,7781.74 3005,7776.49 v1(3005,7754)
  ln4.Cu w5: 2976.44,7715.1 2990.4,7729.06 2990.4,7739.4 v1(3005,7754)
  ln4.Cu w5.4: J8.1@2593,6927 2621.4,6955.4 2633.03,6955.4 2650.1,6972.47 2650.1,7081.65 2698.1,7129.65 2698.1,7431.47 2758.1,7491.47 2758.1,7639.47 2833.53,7714.9 2976.53,7714.9
USB_D-: J7.1 U9.3 | length 1099.3
  F.Cu w5: v1(2964,7754) 2964,7777.49 U9.3@2968.25,7781.74
  ln4.Cu w5: v1(2964,7754) 2978.6,7739.4 2978.6,7733.94 2971.56,7726.9
  ln4.Cu w5.4: J7.1@2592,6997 2621.4,6967.6 2627.97,6967.6 2639.24,6978.87 2639.24,7085.61 2687.48,7133.85 2687.48,7438.1 2745.9,7496.53 2745.9,7644.53 2828.47,7727.1 2971.47,7727.1
USB_DEV_D+: J10.7 U1.2 U9.7 | length 922.7
  F.Cu w5: U1.2@2758.86,8522.22 2771.22,8522.22 J10.7@2800,8551
  F.Cu w7: U9.7@3003.43,7819.87 3011.87,7819.87 3019,7827 v1(3019,7835)
  ln4.Cu w5.4: J10.7@2800,8551 2756.1,8507.1 2756.1,8430.53 2861.1,8325.53 2861.1,8189.53 2991.1,8059.53 2991.1,7882.9 3001,7873 3001,7853 v1(3019,7835)
USB_DEV_D-: J10.6 U1.1 U9.1 | length 924.1
  F.Cu w5: J10.6@2700,8551 2728.78,8522.22 U1.1@2741.14,8522.22
  F.Cu w7: v1(2949,7834) 2949,7826 2955.13,7819.87 U9.1@2964.57,7819.87
  ln4.Cu w5.4: J10.6@2700,8551 2743.9,8507.1 2743.9,8425.47 2848.9,8320.47 2848.9,8184.47 2978.9,8054.47 2978.9,7882.9 2966,7870 2966,7851 v1(2949,7834)
VBATT: C1.1 D1.1 J1.1 Q1.1 Q1.2 Q1.3 U2.1 U2.4 U2.6 | length 459.6
  F.Cu w10: Q1.1@2406.61,7304.88 Q1.2@2432.2,7304.88 Q1.3@2457.8,7304.88
  B.Cu w10: D1.1@2544.72,7293.19 D1.1@2547.91,7290 2547.91,7291.97 2568.5,7312.56 D1.1@2569.93,7312.56 ; 2544.72,7362.52 2561.61,7379.41 U2.1@2564.17,7379.41 ; 2594.92,7337.56 2607.56,7337.56 2631.38,7361.38 2631.38,7377.52 2633.27,7379.41 U2.6@2635.83,7379.41 2638.39,7379.41 2640.28,7377.52 2640.28,7376.96 2646.13,7371.1 C1.1@2670,7371.1 2673.68,7374.79 2689.14,7374.79 2695,7380.65 2695,7424.73 2689.14,7430.59 U2.4@2635.83,7430.59
  B.Cu w20: D1.1@2544.72,7293.19 2544.72,7362.52 ; D1.1@2569.93,7312.56 2594.92,7337.56
  other v2: 2485.81,7181.36 2462.64,7181.66 2462.72,7204.07 2485.96,7203.92 2485.73,7226.41 2462.95,7226.63
VBATT_PROT: C2.1 C3.1 C11.1 C12.1 C13.1 Q1.5 R4.1 U4.6 U7.21 U7.22 U7.23 U7.24 U7.25 U7.26 U7.27 | length 104.9
  B.Cu w10: 2545,7570 2562.74,7570 ; C3.1@2618.14,7625.4 C3.1@2627,7625.4
  B.Cu w30: 2562.74,7570 C3.1@2618.14,7625.4
  other v1: 2644.41,7611.42
  other v2: 2450,7450 2475,7450 2500,7450 2450,7475 2475,7475 2500,7475 2445,7775 2470,7775 2445,7800 2470,7800 2445,7825 2470,7825
VOUT: C15.1 C16.1 C17.1 C19.1 C20.1 C21.1 C22.1 C24.1 C32.1 C33.1 J10.1 J10.9 U8.2 | length 182.5
  B.Cu w10: C19.1@2425,8182.6 C19.1@2437.4,8170.2
  B.Cu w20: C15.1@2340,8182.6 C19.1@2425,8182.6 ; C21.1@2775,8182.6 C20.1@2855,8182.6
  other v1: 2420,8170 2440,8170 2760,8170 2780,8170 2420,8190 2440,8190 2760,8190 2780,8190
  other v2: 2730,7930 2615,8410 2645,8410 2675,8410 2900,8410 2930,8410 2960,8410 2990,8410 3020,8410 2220,8430 2220,8460
{\N\R\S\T\}\: J11.3 U4.5 U5.4 | length 1236.7
  F.Cu w5: J11.3@2150.32,8016.82 2175.32,7991.82 2175.32,7894.82 2167.32,7886.82 v1(2164.32,7886.82)
  F.Cu w7: U5.4@2109.13,7787.13 2120.87,7787.13 v1(2122,7786)
  ln4.Cu w7: v1(2122,7786) 2112,7786 2102,7796 2102,7836 2135,7869 2146.5,7869 v1(2164.32,7886.82)
  In6.Cu w7: v1(2164.32,7886.82) 2174.13,7877 2717,7877 2789,7805 2789,7683 2717.42,7611.42 v1(2670,7611.42)
pads on no net: FID1.Un1 FID2.Un1 FID3.Un1 FID4.Un1 FID5.Un1 FID6.Un1 J11.Un1 J11.Un2 J11.Un3 MH1.Un1 MH2.Un1 MH3.Un1 U3.Un1 U3.Un2 U3.Un3 U3.Un4

## Polygon pours and split planes (outlines as drawn)
GND on F.Cu "F.Cu-GND-1" (solid, remove dead copper, pour order 23): 2102,8757 3092,8757 3241,7616 2896,7616 2896,6780 2316,6780 2316,7612 1961,7614
VOUT on F.Cu "F.Cu-/Block Diagram/Payload Power Control/VOUT" (solid, remove dead copper, pour order 19): 2708.94,7956.97 2710,7890 2920,7890 2960,7930 3150,7930 3070,8520 3040,8590 3040,8730 2160,8730 2160,8600 2110,8550 2100,8490 2600,8490 2580,8400 2401.81,8387.06 2403,7955
Net-(U7-PD) on F.Cu "F.Cu-Net-(U7-PD)" (solid, remove dead copper, pour order 21): 2531.34,7839.37 2698.66,7839.37 2758,7840 2757.6,7870.71 2702,7871 2701.06,7906.97 2701.06,7956.97 2669,7957 2630.9,7942 2555.31,7942 2556.78,7886.79 2531.34,7870.87
VBATT on F.Cu "F.Cu-/Block Diagram/VBATT" (solid, remove dead copper, pour order 17): 2552.89,7106.16 2538,7059 2538,6987 2361,6987 2359,7338 2471,7338 2471,7285 2505.59,7215.24
GND on F.Cu "F.Cu-GND" (solid, remove dead copper, pour order 18): 2173.32,7999.82 2173.32,7880.82 2099.32,7880.82 2099.32,7754.82 2013.32,7754.82 2041.32,7999.82 2055.32,7999.82
VBATT_PROT on F.Cu "F.Cu-/Block Diagram/Payload Power Control/VBATT_PROT" (solid, remove dead copper, pour order 20): 2525,7567 2589,7567 2585,7491 2525,7491 2525,7420 2370,7420 2370,7700 2415,7700 2415,7870 2525,7870 2525,7835 2690,7835 2690,7765 2525,7765
GND on In1.Cu "In1.Cu-GND" (solid, remove dead copper, pour order 25): 2102,8757 3092,8757 3241,7616 2896,7616 2896,6780 2316,6780 2316,7612 1961,7614
VBATT on In1.Cu "In1.Cu-/Block Diagram/VBATT" (solid, remove dead copper, pour order 24): 2316,6966 2597,6966 2596,7275 2320,7275
GND on ln4.Cu "In4.Cu-GND" (solid, remove dead copper, pour order 31): 2102,8757 3092,8757 3241,7616 2896,7616 2896,6780 2316,6780 2316,7612 1961,7614
VBATT_PROT on ln4.Cu "In4.Cu-/Block Diagram/Payload Power Control/VBATT_PROT" (solid, remove dead copper, pour order 29): 2430,7840 2490,7840 2490,7630 2510,7610 2510,7270 2430,7270
GND on In6.Cu "In6.Cu-GND" (solid, remove dead copper, pour order 32): 2102,8757 3092,8757 3241,7616 2896,7616 2896,6780 2316,6780 2316,7612 1961,7614
VOUT on In6.Cu "In6.Cu-/Block Diagram/Payload Power Control/VOUT" (solid, remove dead copper, pour order 26): 2074,8315 2370,8315.3 2370,7906 2910,7906.71 2911,8315.72 3134,8316 3059,8734 2134,8736
GND on B.Cu "B.Cu-GND" (solid, remove dead copper, pour order 16): 2650,7195 2650,7050 2765.06,7050 2766,7895 2578,7895 2578,7357 2635,7300 2635,7220
VBATT on B.Cu "B.Cu-/Block Diagram/VBATT" (solid, remove dead copper, pour order 15): 2710,7330 2621.38,7330 2600,7305.19 2600,7239.05 2555,7151 2552.96,7104.8 2543.83,7010.25 2435,7010 2435,7340 2520,7340 2538,7392 2587.3,7391.39 2587.3,7455 2710,7455
VOUT on B.Cu "B.Cu-/Block Diagram/Payload Power Control/VOUT" (solid, remove dead copper, pour order 28): 2110,8447 2170,8394 3036,8394 3089,8448 3082,8539 3041,8591 3041,8731 2162,8731 2157,8596 2112,8555
VBATT_PROT on B.Cu "B.Cu-/Block Diagram/Payload Power Control/VBATT_PROT" (solid, remove dead copper, pour order 22): 2435,7430 2435,7865 2545,7865 2545,7725 2510,7725 2510,7634.5 2582,7635 2615,7657 2655,7611 2602,7543 2510,7544 2510,7430
GND on In3.Cu "In3.Cu-GND" (solid, remove dead copper, pour order 27): 2102,8757 3092,8757 3241,7616 2896,7616 2896,6780 2316,6780 2316,7612 1961,7614
GND on In5.Cu "In5.Cu-GND" (solid, remove dead copper, pour order 30): 2102,8757 3092,8757 3241,7616 2896,7616 2896,6780 2316,6780 2316,7612 1961,7614
P3V3 on In2.Cu "In2.Cu-/Block Diagram/Data Switches/P3V3" (solid, remove dead copper, pour order 33): 2102,8758 3092,8758 3241,7617 2896,7617 2896,6781 2316,6781 2316,7613 1961,7615

## Keep-outs
F.Cu:
  region: 2290,8115 2288,8113 2267,8113 2267,8129 2290,8129
  region: 2347,8109 2343,8105 2336,8105 2326,8115 2326,8120 2337,8131 2347,8131
B.Cu:
  region: 2577.72,7863.54 2542.28,7863.54 2545,7895 2578,7895
Edge.Cuts:
  circle w10: c2600,8200 r115
  circle w0: c2600,8200 r115
  lines w0: 2108.57,8553.7 ccw(c2108.58,8603.7) 2158.57,8603.71 2158.57,8731.18 3041.43,8731.18 3041.43,8603.91 ccw(c3091.43,8603.7) 3091.43,8553.7 3196.42,7698.58 cw(c3156.72,7693.7) 3156.88,7653.7 2900,7653.7 ccw(c2900,7593.7) 2840,7593.7 2840,6851.19 cw(c2799.99,6851.19) 2800.31,6811.18 2400,6811.18 cw(c2400,6851.18) 2360,6851.05 2360,7593.7 ccw(c2300,7593.7) 2300,7653.7 2043.28,7653.7 cw(c2043.28,7693.7) 2003.54,7698.27 2108.57,8553.7
  lines w10: 2108.57,8553.7 ccw(c2108.58,8603.7) 2158.57,8603.71 2158.57,8731.18 3041.43,8731.18 3041.43,8603.91 ccw(c3091.43,8603.7) 3091.43,8553.7 3196.42,7698.58 cw(c3156.72,7693.7) 3156.88,7653.7 2900,7653.7 ccw(c2900,7593.7) 2840,7593.7 2840,6851.19 cw(c2799.99,6851.19) 2800.31,6811.18 2400,6811.18 cw(c2400,6851.18) 2360,6851.05 2360,7593.7 ccw(c2300,7593.7) 2300,7653.7 2043.28,7653.7 cw(c2043.28,7693.7) 2003.54,7698.27 2108.57,8553.7

## Other copper
F.Cu:
  text "FRONT COPPER" at 2448.44,5966.24 h80
In1.Cu:
  text "INNER 1 COPPER" at 2428.02,5966.24 h80
In2.Cu:
  text "INNER 2 COPPER" at 2428.02,5966.24 h80
In3.Cu:
  text "INNER 3 COPPER" at 2428.02,5966.13 h80
ln4.Cu:
  text "INNER 4 COPPER" at 2428.02,5966.24 h80
In5.Cu:
  text "INNER 5 COPPER" at 2428.02,5966.13 h80
In6.Cu:
  text "INNER 6 COPPER" at 2428.02,5966.13 h80
B.Cu:
  text "BACK COPPER" at 2462.43,5966.24 h80

## Silkscreen, mask and mechanical layers (free items; w line width, h text height)
F.SilkS:
  region: 3077,7934 2877,7934 2877,8134 3077,8134
  lines w10: 2558,6834 2558,6963 ; 2643,6834.5 2643,7101 ; 2877,7934 3077,7934 3077,8134 2877,8134 2877,7934
  text "100069026-001 / SUPI V3" at 2681,8319.25 h30
  text "FORCE / ON" at 2505.59,7940 h25 r90
  text "SELECT" at 2320,7835 h30
  text "DETECT / PAYLOAD" at 2465.59,7560 h25 r90
  text "LO BATT / CUTOFF" at 2836.59,7294 h25 r90
  text "GND" at 2670,7115 h20
  text "VBATT" at 2440,7114.35 h20
  text "1" at 2675,6990 h25
  text "2" at 2770,6990 h25
  text "GPIO" at 2385,6985 h20
  text "0" at 2410,6985 h25
  text "AUX" at 2827.65,6985 h20 r90
  text "+USB-" at 2585.89,6956.97 h20
  text "1" at 2455,6820 h25
  text "FRONT SILK" at 2484.37,5966.24 h80
B.SilkS:
  text "BACK SILK" at 2498.35,5966.24 h80
F.Paste:
  text "FRONT PASTE" at 2468.49,5966.24 h80
B.Paste:
  text "BACK PASTE" at 2482.48,5966.24 h80
F.Mask:
  text "FRONT MASK" at 2474.38,5966.24 h80
B.Mask:
  text "BACK MASK" at 2488.36,5966.24 h80
User.9:
  drawing of 296 lines, arcs and shapes, not listed
User.7:
  circle w10: c3005,7800.71 r105
  circle w10: c2195,7800.71 r105
  circle w10: c2600,8200 r115
  lines w10: 3102.2,8465.93 cw(c3022.8,8456.18) 3022.8,8376.18 ; 2097.8,8465.93 ccw(c2177.2,8456.17) 2177.2,8376.18 3022.8,8376.18 ; 2097.8,8465.93 2097.8,8465.93 ; 3022.8,8376.18 3022.8,8376.18 ; 2170,8090.97 ccw(c2190,8091.18) 2190,8071.18 2225,8071.18 cw(c2225,7876.18) 2420,7876.18 2420,6890.97 ccw(c2440,6891.18) 2440,6871.18 2760.13,6871.18 ccw(c2760,6891.18) 2780,6891.18 2780,7876.18 cw(c2975,7876.18) 2975,8071.18 3010.13,8071.18 ccw(c3010,8091.18) 3030,8091.18 3030,8161.18 ccw(c3010,8161.18) 3010,8181.18 2975,8181.18 cw(c2975,8251.18) 2905,8251.57 2905,8286.18 ccw(c2885,8286.18) 2885,8306.18 2740,8306.18 ccw(c2740,8286.18) 2720,8286.18 2720,8200 cw(c2600,8200) 2480,8200.58 2480,8286.18 ccw(c2460,8286.18) 2460,8306.18 2315,8306.18 ccw(c2315,8286.18) 2295,8286.18 2295,8251.18 cw(c2225,8251.18) 2224.75,8181.18 2190,8181.18 ccw(c2190,8161.18) 2170,8161.18 2170,8090.97 ; 3156.72,7653.7 3156.72,7653.7
Board Shape:
  the board outline again, w10
Dwgs.User:
  drawing of 2339 lines, arcs and shapes, not listed
  text "LAYER STACKUP AND FILENAME" at 11382.06,9527.25 h80
  text "LAYER NAME" at 9421.65,9234.65 h55
  text "TYPE" at 11200.9,9234.76 h55
  text "FILENAME" at 12497.89,9234.65 h55
  text "Er" at 14196.27,9234.76 h55
  text "COPPER LAYER / NUMBER" at 10305.11,9215.85 h55
  text "THICKNESS / (mils)" at 13692.27,9210.25 h55
  text "FRONT SILKSCREEN" at 9067,9007.26 h36
  text "SILKSCREEN" at 10867,9007.26 h36
  text "100069026-001_Rev1-F_SILK.GBR" at 11724,9005.55 h36
  text "String" at 10429.68,9003.73 h36
  text "String" at 13786.68,9003.73 h36
  text "String" at 14236.68,9003.73 h36
  text "FRONT SOLDERMASK" at 9067,8842.26 h36
  text "SOLDERMASK" at 10867,8842.26 h36
  text "1.00" at 13801.23,8842.24 h36
  text "4.50" at 14247.87,8842.24 h36
  text "100069026-001_Rev1-F_MASK.GBR" at 11724,8840.55 h36
  text "String" at 10429.68,8838.73 h36
  text "1" at 10474.44,8677.53 h36
  text "FRONT COPPER" at 9067,8677.26 h36
  text "0.5 OZ COPPER" at 10867,8677.21 h36
  text "1.90" at 13801.23,8677.24 h36
  text "100069026-001_Rev1-F_CU.GBR" at 11724,8675.55 h36
  text "String" at 14236.68,8673.73 h36
  text "370HR  PP106" at 9067,8512.24 h36
  text "PREPREG" at 10867,8512.26 h36
  text "2.30" at 13798.1,8512.24 h36
  text "3.81" at 14251.5,8512.24 h36
  text "String" at 10429.68,8508.73 h36
  text "String" at 11724,8508.73 h36
  text "370HR  PP106" at 9067,8347.24 h36
  text "PREPREG" at 10867,8347.26 h36
  text "2.30" at 13798.1,8347.24 h36
  text "3.81" at 14251.5,8347.24 h36
  text "String" at 10429.68,8343.73 h36
  text "String" at 11724,8343.73 h36
  text "INNER 1 COPPER" at 9067,8182.26 h36
  text "2" at 10468.71,8182.43 h36
  text "1 OZ COPPER" at 10867,8182.26 h36
  text "1.40" at 13801.23,8182.24 h36
  text "100069026-001_Rev1-IN1_CU.GBR" at 11724,8180.55 h36
  text "String" at 14236.68,8178.73 h36
  text "370HR 1x7628" at 9067,8017.24 h36
  text "PREPREG" at 10867,8017.26 h36
  text "8.00" at 13798.24,8017.24 h36
  text "4.34" at 14247.97,8017.24 h36
  text "String" at 10429.68,8013.73 h36
  text "String" at 11724,8013.73 h36
  text "INNER 2 COPPER" at 9067,7852.26 h36
  text "3" at 10469.54,7852.24 h36
  text "1 OZ COPPER" at 10867,7852.26 h36
  text "1.40" at 13801.23,7852.24 h36
  text "100069026-001_Rev1-IN2_CU.GBR" at 11724,7850.55 h36
  text "String" at 14236.68,7848.73 h36
  text "370HR  PP2113" at 9067,7687.24 h36
  text "PREPREG" at 10867,7687.26 h36
  text "3.90" at 13798.44,7687.24 h36
  text "4.09" at 14247.87,7687.24 h36
  text "String" at 10429.68,7683.73 h36
  text "String" at 11724,7683.73 h36
  text "370HR  PP2113" at 9067,7522.24 h36
  text "PREPREG" at 10867,7522.26 h36
  text "3.90" at 13798.44,7522.24 h36
  text "4.09" at 14247.87,7522.24 h36
  text "String" at 10429.68,7518.73 h36
  text "String" at 11724,7518.73 h36
  text "INNER 3 COPPER" at 9067,7357.21 h36
  text "4" at 10468.11,7357.43 h36
  text "1 OZ COPPER" at 10867,7357.26 h36
  text "1.40" at 13801.23,7357.24 h36
  text "100069026-001_Rev1-IN3_CU.GBR" at 11724,7355.55 h36
  text "String" at 14236.68,7353.73 h36
  text "370HR 1x7628" at 9067,7192.24 h36
  text "PREPREG" at 10867,7192.26 h36
  text "8.00" at 13798.24,7192.24 h36
  text "4.34" at 14247.97,7192.24 h36
  text "String" at 10429.68,7188.73 h36
  text "String" at 11724,7188.73 h36
  text "INNER 4 COPPER" at 9067,7027.26 h36
  text "5" at 10469.31,7027.34 h36
  text "1 OZ COPPER" at 10867,7027.26 h36
  text "1.40" at 13801.23,7027.24 h36
  text "100069026-001_Rev1-IN4_CU.GBR" at 11724,7025.55 h36
  text "String" at 14236.68,7023.73 h36
  text "370HR  PP2113" at 9067,6862.24 h36
  text "PREPREG" at 10867,6862.26 h36
  text "3.5" at 13809.92,6862.24 h36
  text "4.09" at 14247.87,6862.24 h36
  text "String" at 10429.68,6858.73 h36
  text "String" at 11724,6858.73 h36
  text "370HR  PP2113" at 9067,6697.24 h36
  text "PREPREG" at 10867,6697.26 h36
  text "3.5" at 13809.92,6697.24 h36
  text "4.09" at 14247.87,6697.24 h36
  text "String" at 10429.68,6693.73 h36
  text "String" at 11724,6693.73 h36
  text "INNER 5 COPPER" at 9067,6532.21 h36
  text "6" at 10468.67,6532.34 h36
  text "1 OZ COPPER" at 10867,6532.26 h36
  text "1.40" at 13801.23,6532.24 h36
  text "100069026-001_Rev1-IN5_CU.GBR" at 11724,6530.55 h36
  text "String" at 14236.68,6528.73 h36
  text "370HR 1x7628" at 9067,6367.24 h36
  text "PREPREG" at 10867,6367.26 h36
  text "8.00" at 13798.24,6367.24 h36
  text "4.34" at 14247.97,6367.24 h36
  text "String" at 10429.68,6363.73 h36
  text "String" at 11724,6363.73 h36
  text "INNER 6 COPPER" at 9067,6202.21 h36
  text "7" at 10468.84,6202.34 h36
  text "1 OZ COPPER" at 10867,6202.26 h36
  text "1.40" at 13801.23,6202.24 h36
  text "100069026-001_Rev1-IN6_CU.GBR" at 11724,6200.55 h36
  text "String" at 14236.68,6198.73 h36
  text "370HR  PP106" at 9067,6037.24 h36
  text "PREPREG" at 10867,6037.26 h36
  text "2.30" at 13798.1,6037.24 h36
  text "3.81" at 14251.5,6037.24 h36
  text "String" at 10429.68,6033.73 h36
  text "String" at 11724,6033.73 h36
  text "370HR  PP106" at 9067,5872.24 h36
  text "PREPREG" at 10867,5872.26 h36
  text "2.30" at 13798.1,5872.24 h36
  text "3.81" at 14251.5,5872.24 h36
  text "String" at 10429.68,5868.73 h36
  text "String" at 11724,5868.73 h36
  text "BACK COPPER" at 9067,5707.26 h36
  text "8" at 10468.41,5707.24 h36
  text "0.5 OZ COPPER" at 10867,5707.21 h36
  text "1.90" at 13801.23,5707.24 h36
  text "100069026-001_Rev1-B_CU.GBR" at 11724,5705.55 h36
  text "String" at 14236.68,5703.73 h36
  text "BACK SOLDERMASK" at 9067,5542.26 h36
  text "SOLDERMASK" at 10867,5542.26 h36
  text "1.00" at 13801.23,5542.24 h36
  text "4.50" at 14247.87,5542.24 h36
  text "100069026-001_Rev1-B_MASK.GBR" at 11724,5540.55 h36
  text "String" at 10429.68,5538.73 h36
  text "BACK SILKSCREEN" at 9067,5377.26 h36
  text "SILKSCREEN" at 10867,5377.26 h36
  text "100069026-001_Rev1-B_SILK.GBR" at 11724,5375.55 h36
  text "String" at 10429.68,5373.73 h36
  text "String" at 13786.68,5373.73 h36
  text "String" at 14236.68,5373.73 h36
  text "TOTAL THICKNESS" at 11724,5212.26 h36
  text "62.0 +/-5" at 13788.38,5212.24 h36
  text "BOARD OUTLINE" at 10867,4882.26 h36
  text "100069026-001_Rev1_EDGECUTS.GBR" at 11724,4880.55 h36
  text "PLATED THRU HOLES" at 10867,4717.26 h36
  text "100069026-001_Rev1_PTH.DRL" at 11724,4715.58 h36
  text "NON-PLATED THRU HOLES" at 10867,4552.26 h36
  text "100069026-001_Rev1_NPTH.DRL" at 11724,4550.58 h36
  text "NOTE: FINISHED OUTER COPPER WEIGHT IS 1 OZ.  THIS SHOULD BE 1/2 OZ BASE FOIL AND 1/2 OZ PLATING." at 8999,4284.21 h59.06
  text "IMPEDANCE" at 11354.92,3527.24 h80
  text "TYPE" at 13240.4,3234.76 h55
  text "TRACE / LAYER" at 9287.05,3215.95 h55
  text "REF PLANE / LAYER" at 9904.38,3216.26 h55
  text "IMPEDANCE / (OHMS)" at 10627.72,3210.25 h55
  text "TRACE WIDTH / (MILS)" at 11389.96,3210.25 h55
  text "TRACE SPACE / (MILS)" at 12155.48,3210.25 h55
  text "5" at 9391.45,3006.22 h40
  text "90" at 10753.61,3006.1 h40
  text "5.4" at 11527.92,3006.1 h40
  text "6.8" at 12287.77,3006.1 h40
  text "4, 6" at 10010.93,3004.16 h40
  text "DIFF COPLANAR WAVEGUIDE, 2 PLANES" at 12685,3004.12 h40
  text "NOTES: UNLESS OTHERWISE SPECIFIED / 1: STANDARDS / 	1.1: THE PCB SHALL BE FABRICATED IN ACCORDANCE WITH THE CURRENT REVISION OF IPC-6012 CLASS 2. / 	1.2: INTERPRET DIMENSIONS AND TOLERANCES IN ACCORDANCE WITH THE CURRENT REVISION OF ASME Y14.5M. / 	1.3: TEST IN ACCORDANCE WITH THE CURRENT REVISION OF IPC-TM-650 2.4.22. / 	1.4: DO NOT SCALE TO DRAWING. / 2: MATERIAL / 	2.1: THE PCB DIELECTRIC MATERIAL SHALL BE 370HR. / 	2.2: THICKNESSES OF CONDUCTOR AND DIELECTRIC SHALL MATCH THE STACKUP DRAWING. / 3: FLATNESS / 	3.1: BOW AND TWIST OF ASSEMBLY SUB-PANEL OR SINGULATED PWB SHALL NOT EXCEED 0.75%. / 	3.2: TEST IN ACCORDANCE WITH CURRENT REVISION OF IPC-TM-650 2.4.22. / 4: ETCH GEOMETRY. / 	4.1: MEASURE WIDTH FROM THE BASE OF THE METALLIZATION. / 	4.2: FINISHED LINE WIDTH AND TERMINAL AREA SHALL NOT DEVIATE FROM THE GERBER PATTERN IMAGE BY MORE THAN 20%. / 5: SURFACE FINISH / 	5.1: FINAL FINISH SHALL BE IN ACCORDANCE WITH IPC-4552 AND SHALL BE ENIG. / 6: HOLES / 	6.1: SEE HOLE TABLE FOR DIMENSIONS (AFTER PLATING WHERE APPLICABLE). / 	6.2: PLATING IN HOLES SHALL BE CONTINUOUS ELECTROLYTIC COPPER IN ACCORDANCE WITH IPC-6012, CLASS 2. / 	6.3: SEE DRILL CHART FOR FINISHED HOLE SIZE AND PLATING. / 	6.4: ALL HOLES SHALL BE LOCATED WITHIN 3 MIL OF TRUE POSITION AS SUPPLIED IN CAD DATA. / 	6.5: THE TOLERANCE FOR ALL HOLES SHALL BE AS INDICATED IN THE HOLE TABLE. / 	6.6: HOLES IN THE HOLE TABLE MARKED AS {dblquote}CAPPED/FILLED{dblquote} SHALL BE FILLED WITH A NON-CONDUCTIVE MATERIAL AND PLATED OVER. / 7: SOLDERMASK / 	7.1: SOLDERMASK OVER BARE COPPER (SMOBC) ON PRIMARY AND SECONDARY SIDES USING SUPPLIED ARTWORK IN ACCORDANCE WITH CURRENT REVISION OF IPC-SM-840 TYPE B. / 	7.2: COLOR: GREEN. / 	7.3: LIQUID PHOTO-IMAGEABLE (LPI) 0.001 INCH TO 0.002 INCH THICKNESS, HALOGEN FREE. / 	7.4: NO BLEED-OUT ALLOWED OVER EXPOSED SMD PADS. / 8: SILKSCREEN / 	8.1: SILKSCREEN PRIMARY AND SECONDARY SIDE WITH NON-CONDUCTIVE, NON-NUTRIENT EPOXY INK. / 	8.2: COLOR: WHITE. / 	8.3: ANY UNSPECIFIED STROKE WIDTH SHALL BE 5 MIL. / 	8.4: CLIP SILKSCREEN AWAY FROM ANY EXPOSED METAL. / 9: FINISHING / 	9.1: REMOVE ALL BURRS AND BREAK SHARP EDGES. / 10: IMPEDANCE (ALL TOLERANCED +/- 10%) / 	10.1: SEE IMPEDANCE REFERENCE TABLES. / 	10.2: VENDOR MAY ADJUST DESIGN GEOMETRIES UP TO +/-20% TO ACHIEVE TARGET IMPEDANCE. ADJUSTMENTS BEYOND 20% OF LINE WIDTH, SPACING OR DIELECTRIC THICKNESS SHALL REQUIRE APPROVAL FROM DRAPER ENGINEERING. / 	10.3: VENDOR MAY SUBSTITUTE SPECIFIC CORES OR PREPREGS TO ACHIEVE IMPEDANCE TARGETS AS LONG AS THE DIELECTRIC REMAINS UNCHANGED. / 11: PANELIZED PWBS LAYOUT / 	11.1: IF THE PWB IS PANELIZED, THE VENDOR HAS THE FREEDOM TO MOVE INDIVIDUAL OR GROUPED PWBS TO ANY LOCATION ON THE PANEL TO EASE FABRICATION OR TEST. / 12: NON-DESTRUCTIVE EVALUATION / 	12.1: ALL PWBS SHALL PASS 100% ELECTRICAL TEST USING SUPPLIED IPC-D-365 NETLIST IN ACCORDANCE WITH CURRENT REVISION OF IPC-9252, CLASS 2. / 	12.2: CERTIFICATE OF CONFORMANCE SHALL BE SUPPLIED WITH EACH SHIPMENT. / 	12.3: ALL BARE BOARDS THAT PASS ELECTRICAL TEST SHALL BE MARKED WITH WHITE EPOXY INK, IN ACCORDANCE WITH MIL-STD-130, WITH THE LETTERS 'ET'.  MARKING SHALL NOT INTERFERE WITH ANY TRACE OR MOUNTING PAD." at 720,-813.03 h50
F.Adhes:
  text "FRONT ADHESIVE" at 2434.27,5966.24 h80
B.Adhes:
  text "BACK ADHESIVE" at 2448.26,5966.24 h80

## Dimensions
2158.57,8731.18 to 3041.43,8731.18 on Eco1.User
2003,7694 to 3196,7694 on Eco1.User
2360,6858 to 2840,6858 on Eco1.User
2051,7654 to 2051,8731 on Eco1.User
2595,6811 to 2595,8731 on Eco1.User
2485,8200 to 2715,8200 on Eco1.User

## Text inside footprints (layer, text, board x,y; h text height)
J11: Cmts.User "KEEPOUT" at 2179.77,8000.36 h15.75 r90